# Altium PCB board-rf-4kenh.PcbDoc
Units mm, origin at the board's own origin, x right, y up, seen from the top; angles counter-clockwise.
Board outline 93 x 64 mm, 2 copper layers (Top Layer, Bottom Layer); 76 components, 57 nets, 215 pads, 0 vias.
Unrouted connection lines stored in the file: 1.
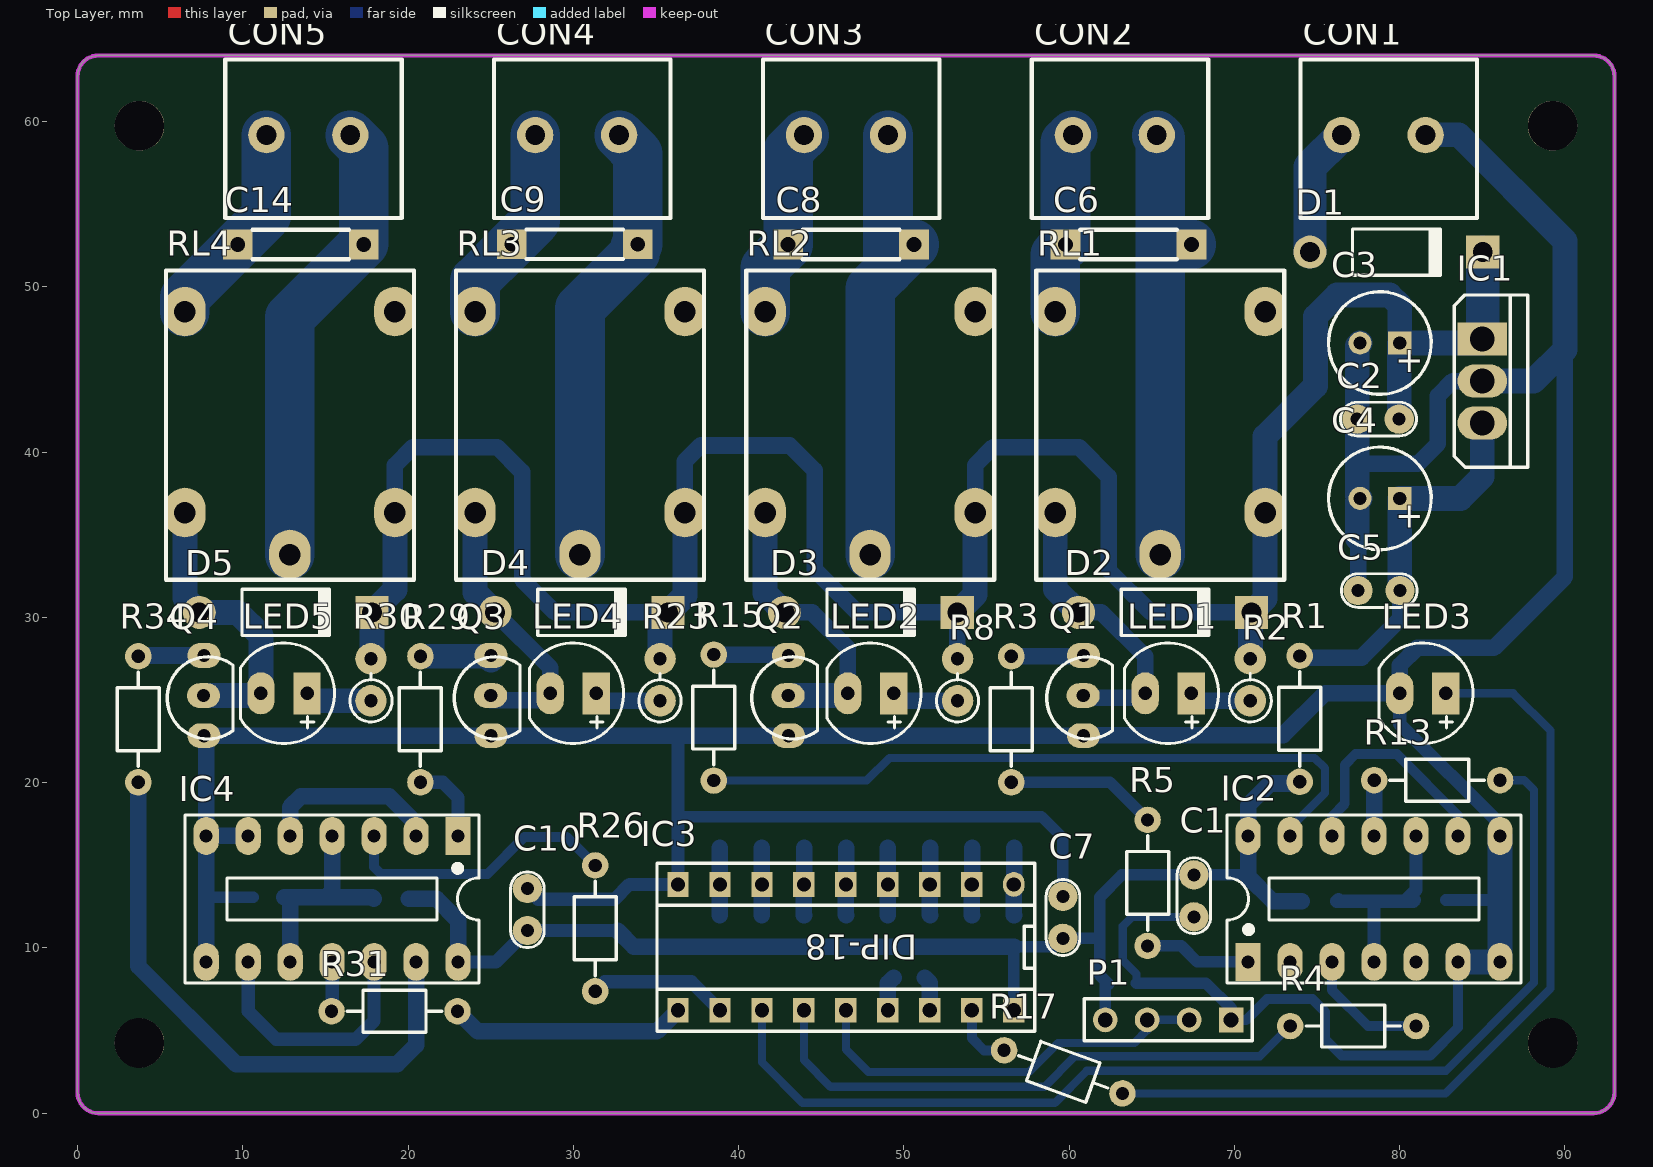
[diagram p0: Top Layer view]
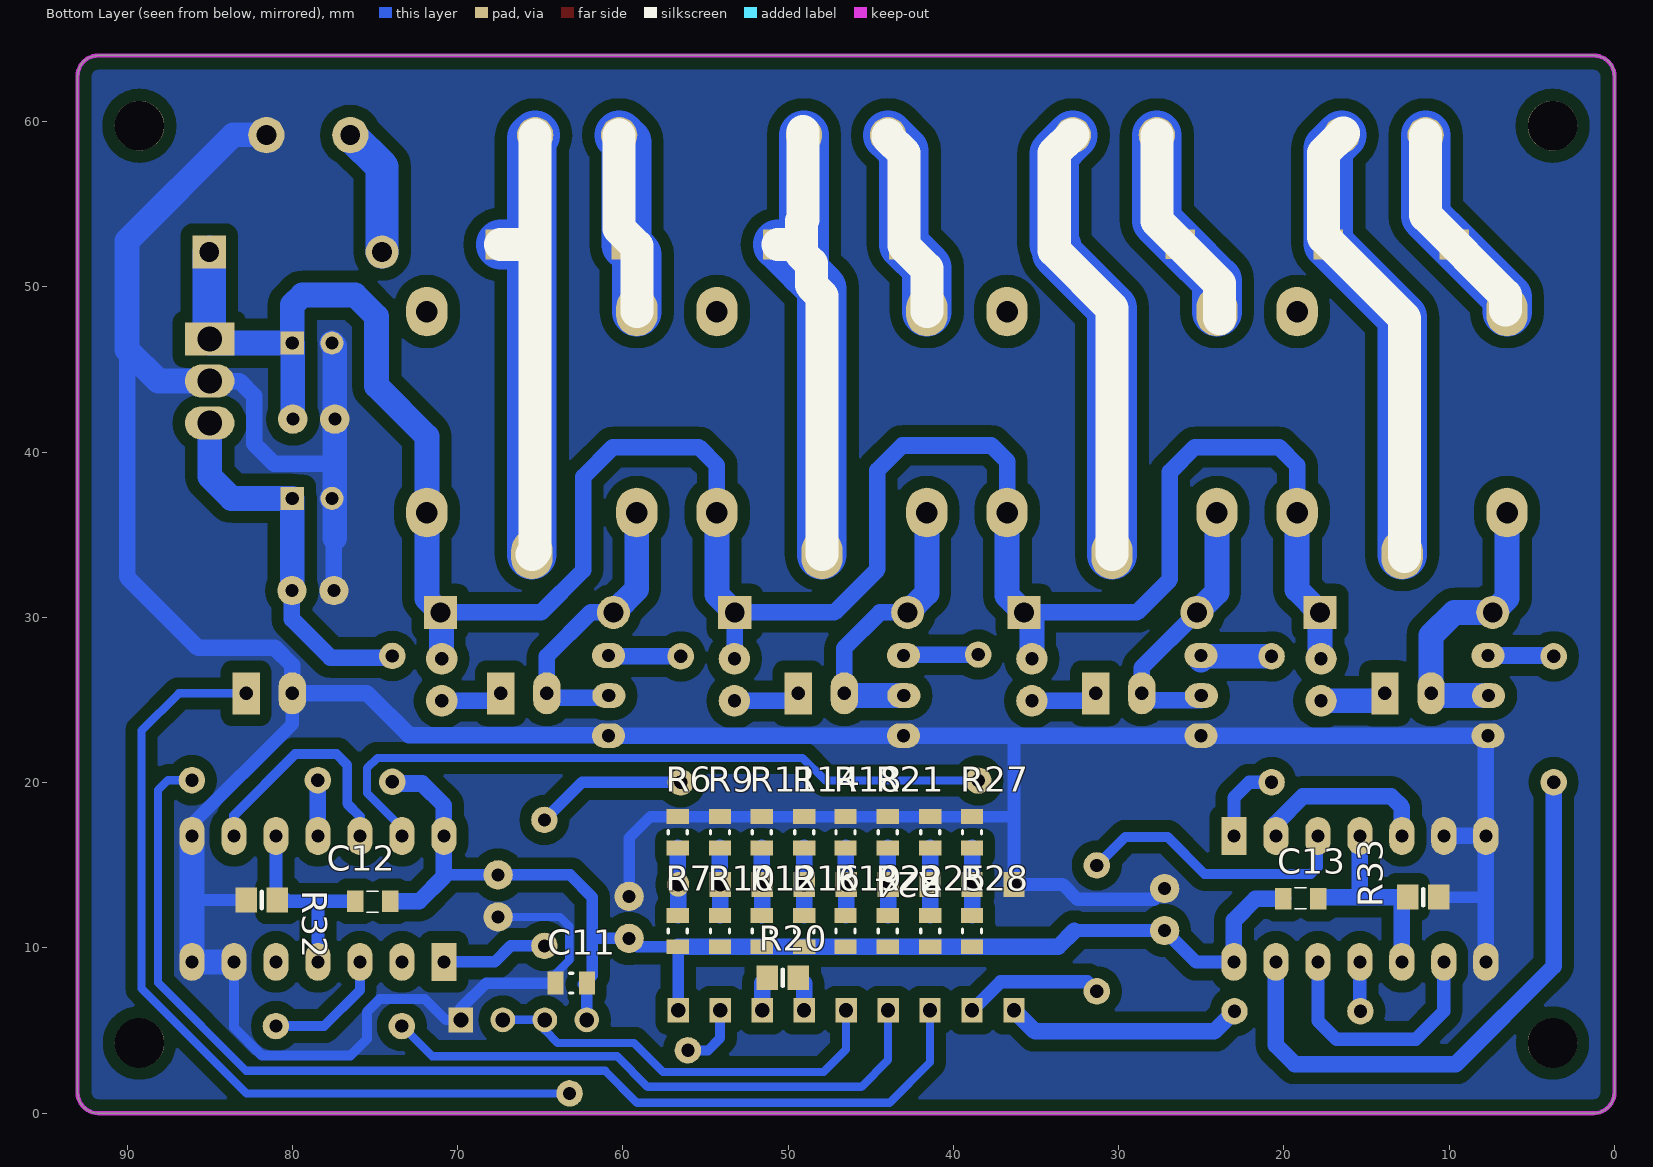
[diagram p1: Bottom Layer view, seen from below]
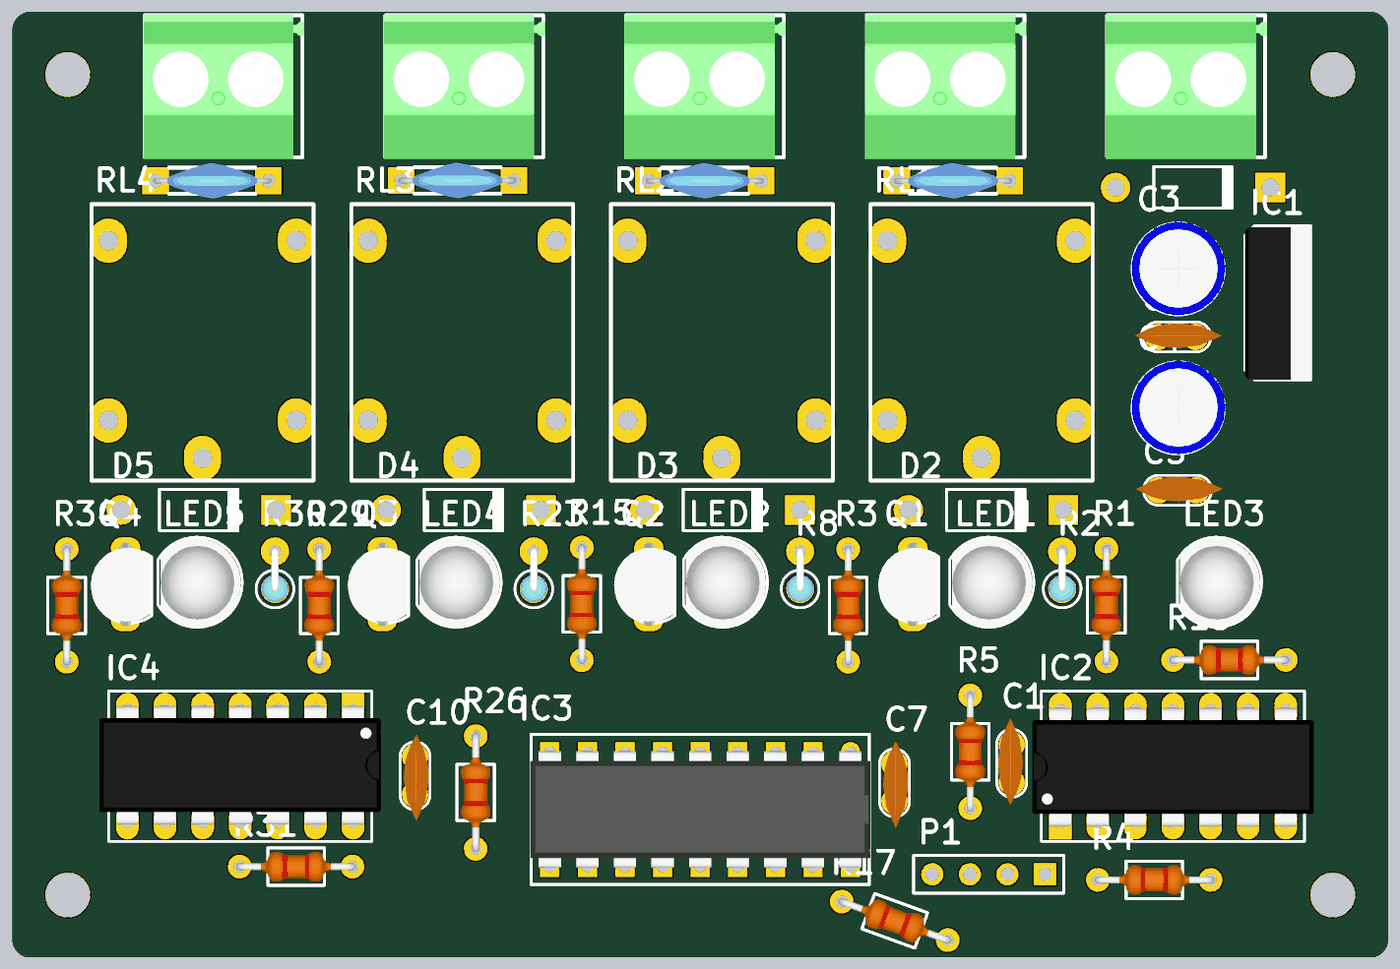
[diagram p2: 3D render of the assembled board from above, using the file's embedded part models]
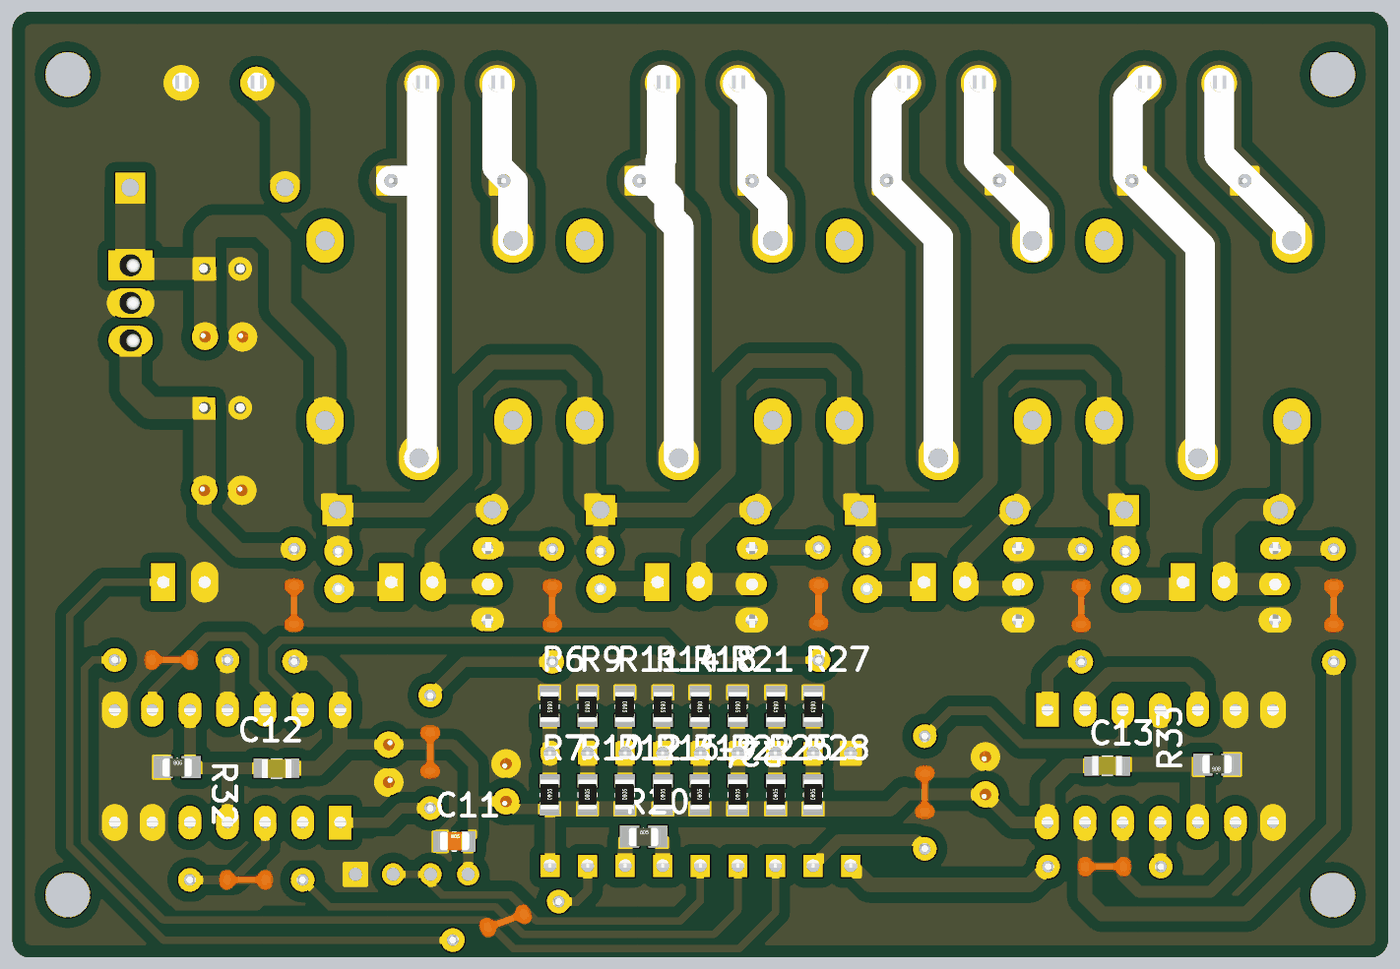
[diagram p3: 3D render of the assembled board from below, using the file's embedded part models]

## Layer stack, top to bottom
Top Solder: solder mask 0.0102, Solder Resist, Dk 3.5
Top Layer: signal copper 0.0356
Dielectric 1: dielectric 0.32, FR-4, Dk 4.8
Bottom Layer: signal copper 0.0356
Bottom Solder: solder mask 0.0102, Solder Resist, Dk 3.5

## Board outline
0,1.27 0,62.73 cw(c1.27,62.73) 1.27,64 91.73,64 cw(c91.73,62.73) 93,62.73 93,1.27 cw(c91.73,1.27) 91.73,0 1.27,0 cw(c1.27,1.27)

## Design rules (kind name [scope] priority, off if disabled: settings)
Clearance Clearance_1 [InPolygon] p1: gap=0.724 ignorepadtopadclearanceinfootprint=FALSE except(0: Text-Hole)
Clearance [All] p2: gap=0.254 ignorepadtopadclearanceinfootprint=FALSE except(0: Arc-Hole Track-Hole SMDPad-Hole THPad-Hole Via-Hole Fill-Hole Poly-Hole Region-Hole Text-Hole)
PlaneConnect [All] p1: planeconnectstyle=Direct reliefexpansion=0.508 reliefentries=4 reliefconductorwidth=0.254 reliefairgap=0.254
PolygonConnect [All] p1: connectstyle=Direct reliefconductorwidth=0.254 reliefentries=4 polygonreliefangle="90 Angle" airgapwidth=0.254
RoomDefinition board-rf-4kenh [InComponentClass('board-rf-4kenh')] p1: confinementstyle=ConfineIn formatcopy=TRUE lockcomponents=FALSE outline -20,87 359,87 359,112 -20,112
RoutingVias [All] p1: holewidth=0.711 width=1.27 viastyle="Through Hole" minholewidth=0.711 minwidth=1.27 maxholewidth=0.711 maxwidth=1.27
SolderMaskExpansion [All] p1: expansion=0.102
Width [All] p1: maxlimit=3 minlimit=0.254 preferedwidth=2
29 further rules are at their usual default settings.

## Components (designator, comment, footprint, x,y, rotation, side; value= is the part's Value field where it differs from the comment)
C1 "Cap1" C_Ceramic 67.55,13.15 r90 top value=104
C2 "Cap1" C_Ceramic 78.7,42 r0 top value=104
C3 "Cap2" "CAPACITOR 6.3x11" 78.8,46.6 r180 top value=10uF
C4 "Cap2" "CAPACITOR 6.3x11" 78.8,37.2 r180 top value=10uF
C5 "Cap1" C_Ceramic 78.75,31.625 r0 top value=104
C6 "103/2KV" 103/2KV 59.78,52.56 r0 top
C7 "Cap1" C_Ceramic 59.625,11.85 r270 top value=104
C8 "103/2KV" 103/2KV 43,52.56 r0 top
C9 "103/2KV" 103/2KV 26.28,52.581 r0 top
C10 "Cap1" C_Ceramic 27.225,12.325 r270 top value=104
C11 "Cap1" "CM 0805" 63.125,7.875 r180 bottom value=104
C12 "Cap2" CM-0805 75.125,12.825 r0 bottom value=100nF
C13 "Cap2" CM-0805 19,12.975 r180 bottom value=100nF
C14 "103/2KV" 103/2KV 9.7,52.56 r0 top
CON1 "Terminal 2" "Terminal 2 5.08" 79.03,59.182 r0 top value="Connector 2"
CON2 "Terminal 2" "Terminal 2 5.08" 62.765,59.182 r0 top value="Connector 2"
CON3 "Terminal 2" "Terminal 2 5.08" 46.5,59.182 r0 top value="Connector 2"
CON4 "Terminal 2" "Terminal 2 5.08" 30.235,59.182 r0 top value="Connector 2"
CON5 "Terminal 2" "Terminal 2 5.08" 13.97,59.182 r0 top value="Connector 2"
D1 "Diode 1N4007" DO-41 79.796,52.1 r0 top
D2 "Diode 1N4148" DO-41 65.8,30.3 r0 top
D3 "Diode 1N4148" DO-41 48,30.3 r0 top
D4 "Diode 1N4148" DO-41 30.5,30.3 r0 top
D5 "Diode 1N4148" DO-41 12.6,30.3 r0 top
IC1 "LM7805" TO220 87.4,49.56 r270 top
IC2 "CD4013" DIP14/W0.3 70.83,9.155 r0 top
IC3 "PT2272" DIP.100/18/W.300/L.900 46.495,10.035 r180 top
IC4 "CD4013" DIP14/W0.3 23.03,16.775 r180 top
LED1 "LED" LED-5R 66,25.409 r180 top value="LED 3 ly Single Colour"
LED2 "LED" LED-5R 48,25.409 r180 top value="LED 3 ly Single Colour"
LED3 "LED" LED-5R 81.397,25.409 r180 top value="LED 3 ly Single Colour"
LED4 "LED" LED-5R 30,25.409 r180 top value="LED 3 ly Single Colour"
LED5 "LED" LED-5R 12.497,25.409 r180 top value="LED 3 ly Single Colour"
P1 "Module RF" HDR1X4 69.805,5.65 r180 top
Q1 "NPN" TRAN-LOWPOWER 61,25.13 r0 top
Q2 "NPN" TRAN-LOWPOWER 43.151,25.13 r0 top
Q3 "NPN" TRAN-LOWPOWER 25.151,25.13 r0 top
Q4 "NPN" TRAN-LOWPOWER 7.785,25.13 r0 top
R1 "Res1" R0.25W-D7.6 73.95,20.05 r90 top value=0R
R2 "Res1" "R 1/4W1" 70.959,26.222 r90 top value=1K
R3 "Res1" R0.25W-D7.6 56.5,20.024 r90 top value=2.2k
R4 "Res1" R0.25W-D7.6 80.995,5.275 r180 top value=100R
R5 "Res1" R0.25W-D7.6 64.75,10.125 r90 top value=2.2k
R6 "0" "R 0805" 56.675,17 r270 bottom value=1k
R7 "0" "R 0805" 56.675,11.025 r90 bottom value=1k
R8 "Res1" "R 1/4W1" 53.25,26.222 r90 top value=1K
R9 "0" "R 0805" 54.125,17 r270 bottom value=1k
R10 "0" "R 0805" 54.125,11.025 r90 bottom value=1k
R11 "0" "R 0805" 51.6,17 r270 bottom value=1k
R12 "0" "R 0805" 51.6,11.025 r90 bottom value=1k
R13 "Res1" R0.25W-D7.6 78.455,20.15 r0 top value=100R
R14 "0" "R 0805" 49.025,17 r270 bottom value=1k
R15 "Res1" R0.25W-D7.6 38.5,20.13 r90 top value=2.2k
R16 "0" "R 0805" 49.025,11.025 r90 bottom value=1k
R17 "Res1" R0.25W-D7.6 63.225,1.2 r160 top value=1K
R18 "0" "R 0805" 46.525,17 r270 bottom value=1k
R19 "0" "R 0805" 46.525,11.025 r90 bottom value=1k
R20 "Res1" R0805 50.325,8.2 r180 bottom value=820k
R21 "0" "R 0805" 43.975,17 r270 bottom value=1k
R22 "0" "R 0805" 43.975,11.025 r90 bottom value=1k
R23 "Res1" "R 1/4W1" 35.25,26.222 r90 top value=1K
R24 "0" "R 0805" 41.4,17 r270 bottom value=1k
R25 "0" "R 0805" 41.4,11.025 r90 bottom value=1k
R26 "Res1" R0.25W-D7.6 31.325,14.995 r270 top value=100R
R27 "0" "R 0805" 38.875,17 r270 bottom value=1k
R28 "0" "R 0805" 38.875,11.025 r90 bottom value=1k
R29 "Res1" R0.25W-D7.6 20.75,20.024 r90 top value=2.2k
R30 "Res1" "R 1/4W1" 17.759,26.222 r90 top value=1K
R31 "Res1" R0.25W-D7.6 15.375,6.17 r0 top value=100R
R32 "Res1" R0805 81.85,12.9 r180 bottom value=1K
R33 "Res1" R0805 11.575,13.075 r0 bottom value=1K
R34 "Res1" R0.25W-D7.6 3.683,20.024 r90 top value=2.2k
RL1 "Relay" RELAY5PIN-10A 65.508,33.805 r0 top value="Relay SPDT, 10A, 12V"
RL2 "Relay" RELAY5PIN-10A 47.957,33.805 r0 top value="Relay SPDT, 10A, 12V"
RL3 "Relay" RELAY5PIN-10A 30.405,33.805 r0 top value="Relay SPDT, 10A, 12V"
RL4 "Relay" RELAY5PIN-10A 12.854,33.805 r0 top value="Relay SPDT, 10A, 12V"

## Footprints (in the part's own frame and the unit in brackets; to place one, negate y for a bottom-side part, rotate by r counter-clockwise, add the part's x,y. Pads: shape width x height; smd on the part's side, far side on the other; paste and mask are expansions set on the pad)
103/2KV [mm]
  rect 1.8x1.8 hole 0.9: 1(0,0) 2(7.62,0)
  silkscreen extent 0.89,-0.89 6.73,0.89, body extent -0.19,-1.2 7.81,1.19, height 9.03
C_Ceramic [mil] "Ceramic Capacitor"
  round 70 hole 31: 1(-50,0) 2(50,0)
  silkscreen extent -90,-40 91,40, body extent -110,-30 120,37, height 265
"CAPACITOR 6.3x11" [mm] "Capacitor, Electrolytic, Radial; Body 10 x 11 mm (Dia.xH typ); Pin Spacing 5 mm (typ)"
  rect 1.4x1.4 hole 0.8: 1(-1.2,0)
  round 1.4 hole 0.8: 2(1.2,0)
  silkscreen extent -3.1,-3.1 3.11,3.1, body extent -3.2,-3.2 3.15,3.15, height 7.33
"CM 0805" [mm]
  rect 0.95x1.4 smd: 1(-0.95,0) 2(0.95,0)
  silkscreen extent -0.1,-0.6 0.1,0.6, body extent -0.97,-0.6 1.03,0.65, height 0.78
CM-0805 [mm] "Capacitor SMD 80x50mil"
  rect 1x1.3 smd: 1(-1.041,0) 2(1.067,0)
  silkscreen extent -0.33,-0.61 0.36,0.66, body extent -1.01,-0.61 1.01,0.66, height 0.61
DIP14/W0.3 [mil] "14PIN, W 300mil, Pin to pin 100mil"
  rect 60x90 hole 31: 1(0,0)
  oval 60x90 hole 31: 2(100,0) 3(200,0) 4(300,0) 5(400,0) 6(500,0) 7(600,0) 8(600,300) 9(500,300) 10(400,300) 11(300,300) 12(200,300) 13(100,300) 14(0,300)
  silkscreen extent -50,-50 650,350, body extent -75,-10 675,305, height 159
DIP.100/18/W.300/L.900 [mil]
  oval 51x59 hole 34: 1(-400,-150)
  rect 51x59 / inner round 58 / far side rect 51x59 hole 34: 2(-300,-150) 3(-200,-150) 4(-100,-150) 5(0,-150) 6(100,-150) 7(200,-150) 8(300,-150) 9(400,-150) 10(400,150) 11(300,150) 12(200,150) 13(100,150) 14(0,150) 15(-100,150) 16(-200,150) 17(-300,150) 18(-400,150)
  silkscreen extent -450,-200 450,200, body extent -453,-155 453,155, height 200
DO-41 [mm] "Diode, Axial; Body 5.2 x 2.7 mm (LxDia. max), Lead Dia. 0.86 mm (max)"
  round 2 hole 1.2: 1(-5.23,0)
  rect 2x2 hole 1.2: 2(5.23,0)
  silkscreen extent -2.65,-1.4 2.75,1.4
HDR1X4 [mm] "Connector; Header; 4 Position"
  rect 1.5x1.5 hole 0.9: 1(0,0)
  round 1.5 hole 0.9: 2(2.54,0) 3(5.08,0) 4(7.62,0)
  silkscreen extent -1.27,-1.27 8.89,1.27
LED-5R [mil] "LED 2 PIN, 5 ly , Only Red colour, pin to pin 110mil"
  rect 65x100 hole 32: 1(-55,0)
  oval 65x100 hole 32: 2(55,0)
  silkscreen extent -120,-120 104,120, body extent -116,-117 98,120, height 485
R0.25W-D7.6 [mm]
  round 1.6 hole 0.8: 1(0,0) 2(7.62,0)
  silkscreen extent 0.95,-1.27 6.67,1.27, body extent -0.25,-1 7.85,1, height 1.3
R0805 [mm] "Chip Resistor; Body 2.0 x 1.2 mm (LxW typ)"
  rect 1.3x1.5 smd: 1(0.95,0) 2(-0.95,0)
  silkscreen extent 0,-0.5 0,0.5, body extent -1,-0.65 1,0.6, height 0.78
"R 1/4W1" [mm] "R 1/4W, 2 Pin, 150mil"
  round 1.905 hole 0.8: 1(-1.27,0) 2(1.27,0)
  silkscreen extent -2.55,-1.28 0.38,1.27, body extent -2.16,-0.92 1.55,0.92, height 6.75
"R 0805" [mm]
  rect 0.9x1.35 smd: 1(-0.95,0) 2(0.95,0)
  silkscreen extent -0.1,-0.58 0.1,0.58, body extent -0.97,-0.62 1.03,0.63, height 0.5
RELAY5PIN-10A [mm]
  oval 2.5x3 hole 1.3: 1(0,0) 2(-6.35,14.7) 3(6.35,14.7) 4(-6.35,2.54) 5(6.35,2.54)
  silkscreen extent -7.49,-1.52 7.51,17.18, body extent -7.49,-1.52 7.49,17.14, height 16
"Terminal 2 5.08" [mm] "Terminal block 5.08mm 2 ways"
  round 2.2 hole 1.2: 1(-2.54,0) 2(2.54,0)
  silkscreen extent -5.02,-5.02 5.65,4.57, body extent -5.13,-5.15 5.78,4.65, height 14.2
TO220 [mm]
  rect 2x3 hole 1.5: 1(2.72,-2.4)
  oval 2x3 hole 1.5: 2(5.26,-2.4) 3(7.8,-2.4)
  silkscreen extent 0.05,-4.1 10.47,0.35, body extent 0.15,-4.1 10.45,0.4, height 18.8
TRAN-LOWPOWER [mm] "TO, Flat Index; 3 In-Line, Axial Leads; Body Dia. 4.5mm; Leads 0.51 x 0.48 mm (max)"
  oval 2x1.5 hole 0.8: 1(-0.127,-2.286) 2(-0.151,0.139) 3(-0.127,2.564)
  silkscreen extent -2.35,-2.48 1.63,2.48, body extent -2.48,-2.79 1.52,3.01, height 11

## Part data
C1 C2 C5 C7 C10 C11: "Polar Capacitor", LatestRevisionDate=17-Jul-2002, LatestRevisionNote="Re-released for DXP Platform.", PackageDescription="Radial Cap, Thru-Hole; 2 Leads; 0.3 in Pin Spacing", PackageReference=RAD-0.3, Published=8-Jun-2000, Publisher="Altium Limited"
C3 C4 C12 C13: "Capacitor", PackageDescription="Capacitor; 2 Leads", PackageReference=CAPR5-4X5, Published=23-Sep-2002, Publisher="Altium Limited"
D1: "1 Amp General Purpose Rectifier", Code_JEDEC=DO-204-AL, ComponentLink1Description="Manufacturer Link", ComponentLink1URL=http://www.fairchildsemi.com/, ComponentLink2Description=Datasheet, ComponentLink2URL=http://www.fairchildsemi.com/ds/1N%2F1N4001.pdf, DatasheetVersion=1998, LatestRevisionDate=17-Jul-2002, LatestRevisionNote="Re-released for DXP Platform.", PackageDescription="Diode, Axial; Body 5.2 x 2.7 mm (LxDia. max), Lead Dia. 0.86 mm (max)", PackageReference=DO-41, PackageVersion=Aug-1999, Published=8-Jun-2000, Publisher="Altium Limited"
D2 D3 D4 D5: "High Conductance Fast Diode", Code_JEDEC=DO-204-AH, ComponentLink1Description="Manufacturer Link", ComponentLink1URL=http://www.fairchildsemi.com/, ComponentLink2Description=Datasheet, ComponentLink2URL=http://www.fairchildsemi.com/ds/1N%2F1N4148.pdf, DatasheetVersion=1997, LatestRevisionDate=17-Jul-2002, LatestRevisionNote="Re-released for DXP Platform.", PackageDescription="Diode, Axial; Body 3.8 x 1.9 mm (LxDia. max), Lead Dia. 0.53 mm (max)", PackageReference=DO-35, Published=8-Jun-2000, Publisher="Altium Limited"
IC1: library part LM78xx, "On ap +, from + 5 to + 24VDC", =LM7808
IC2 IC4: library part CD4013B, "Dual D-Type Flip-Flop", Creat by=VanDungEvn@Gmail.com
IC3: "Remote Control Decoder"
LED1 LED2 LED3 LED4 LED5: "LED Single colour Green and Red"
P1: library part "Header 4", "Header, 4-Pin", LatestRevisionDate=17-Jul-2002, LatestRevisionNote="Re-released for DXP Platform.", Publisher="Altium Limited"
Q1 Q2 Q3 Q4: "NPN General", PackageDocument=Sep-1998, Code_JEDEC=TO-92A, ComponentLink1Description="Manufacturer Link", ComponentLink1URL=http://www.fairchildsemi.com/, ComponentLink2Description=Datasheet, ComponentLink2URL=http://www.fairchildsemi.com/ds/2N%2F2N3904.pdf, DatasheetDocument=1997, LatestRevisionDate=15-Jan-2003, LatestRevisionNote="PCB Footprint 'BCY-W3/D4.7' replaced", PackageReference=TO-92A, Published=8-Jun-2000, Publisher="Altium Limited"
R1 R2 R3 R4 R5 R8 R13 R15 R17 R20 R23 R26 R29 R30 R31 R32 R33 R34: "Resistor", LatestRevisionDate=17-Jul-2002, LatestRevisionNote="Re-released for DXP Platform.", PackageDescription="Axial Device, Thru-Hole; 2 Leads; 0.3 in Pin Spacing", PackageReference=AXIAL-0.3, Published=8-Jun-2000, Publisher="Altium Limited"
R6 R7 R9 R10 R11 R12 R14 R16 R18 R19 R21 R22 R24 R25 R27 R28: library part RM, "Resistor SMD", Manufacturer=UniOhm, Manufacturer No=RM10JTN102, Power Rating=1/10W, Specification="1k  1/10W"
RL1 RL2 RL3 RL4: library part "Relay 1", "Relay SPDT 5 Pin", ="Relay SPDT, 10A, 24V"

## Free pads (board coordinates)
  round 3 hole 3: 0(3.75,4.25) 0(3.75,59.75) 0(89.25,4.25) 0(89.25,59.75)

## Nets (pads, with @x,y where several pads share a name; then routed paths per layer and width w, separated by ;. In a path a pad name is that pad's centre, name@x,y a point inside that pad or via, vN(x,y) a via of type N, cw(c..) or ccw(c..) an arc to the next point about the centre after c; other vN are vias at no path point)
+12V: C2.2 C3.1 D1.2 D2.2 D3.2 D4.2 D5.2 IC1.1 R2.2 R8.2 R23.2 R30.2 RL1.5 RL2.5 RL3.5 RL4.5 | length 156.3
  Bottom Layer w1: RL4.5 19.204,39.204 20.3,40.3 25.4,40.3 26.9,38.8 26.9,32.3 28.9,30.3 D4.2 ; RL3.5 36.755,39.455 37.7,40.4 43.1,40.4 44.6,38.9 44.6,32.9 47.2,30.3 D3.2 53.23,27.664 R8.2@53.25,27.644 ; RL2.5 54.307,39.207 55.4,40.3 60.6,40.3 62.4,38.5 62.4,32.85 64.95,30.3 D2.2
  Bottom Layer w1.5: R30.2 17.83,27.563 D5.2 19.204,31.674 RL4.5 ; R23.2@35.25,27.75 35.25,29.82 D4.2 36.755,31.325 RL3.5 ; D3.2 54.307,31.377 RL2.5 ; R2.2@70.975,27.492 70.975,30.245 D2.2 71.858,31.128 RL1.5 71.858,40.958 74.9,44 74.9,48.2 76.2,49.5 79.4,49.5 80,48.9 C3.1 ; C2.2 79.97,46.57 C3.1 ; IC1.1 84.76,46.6 C3.1
  Bottom Layer w2: IC1.1 85.026,46.866 D1.2
A1: IC3.1 R6.2 R7.2 | length 4.1
  Bottom Layer w1: R7.2 56.655,11.995 IC3.1 56.675,13.865 R6.2
A2: IC3.2 R9.2 R10.2 | length 4.1
  Bottom Layer w1: R10.2 54.115,11.985 IC3.2 54.125,13.855 R9.2
A3: IC3.3 R11.2 R12.2 | length 4.1
  Bottom Layer w1: R12.2 51.575,12 IC3.3 51.6,13.87 R11.2
A4: IC3.4 R14.2 R16.2 | length 4.1
  Bottom Layer w1: R16.2 49.035,11.985 IC3.4 49.025,13.855 R14.2
A5: IC3.5 R18.2 R19.2 | length 4.1
  Bottom Layer w1: R19.2 46.495,12.005 IC3.5 46.525,13.875 R18.2
A6: IC3.6 R21.2 R22.2 | length 4.1
  Bottom Layer w1: R22.2 43.955,11.995 IC3.6 43.975,13.865 R21.2
A7: IC3.7 R24.2 R25.2 | length 4.1
  Bottom Layer w1: R25.2 41.415,11.99 IC3.7 41.4,13.86 R24.2
A8: IC3.8 R27.2 R28.2 | length 4.1
  Bottom Layer w1: R28.2 IC3.8 R27.2
DATAIN: IC3.14 P1.2 P1.3 | length 25.4
  Bottom Layer w0.5: IC3.14 46.495,3.855 47.848,2.502 57.577,2.502 59.325,4.25 63.95,4.25 64.725,5.025 P1.3 P1.2
GND: C1.1 C2.1 C3.2 C4.2 C5.1 C7.1 C10.1 C11.1 CON1.2 IC1.2 IC2.6 IC2.7 IC2.8 IC3.9 IC4.6 IC4.7 IC4.8 LED3.2 P1.1 Q1.1 Q2.1 Q3.1 Q4.1 R6.1 R9.1 R11.1 R14.1 R18.1 R21.1 R24.1 R27.1 R32.2 R33.2 | length 277.3
  Bottom Layer w0.5: C11.1 64.075,8.425 63.25,9.25 63.25,11.325 63.805,11.88 C1.1
  Bottom Layer w0.6: P1.1 70.715,5.65 71.965,6.9 74.725,6.9 75.487,6.138 75.487,4.488 76.475,3.5 81.85,3.5 83.53,5.18 IC2.6
  Bottom Layer w0.7: 7.79,13 7.865,13.075 R33.2 ; 36.335,17.925 36.36,17.95 R27.1 R24.1 R21.1 R18.1 R14.1 R11.1 R9.1 R6.1 58.325,17.95 59.625,16.65 C7.1 ; C11.1 68.275,7.875 69.805,6.345 P1.1 ; R32.2 86.07,12.9
  Bottom Layer w0.8: C10.1 27.87,12.95 32.5,12.95 33.395,13.845 IC3.9 36.335,17.925 36.335,22.804 36.375,22.844 ; LED3.2 80,23.55 86.07,17.48 IC2.8
  Bottom Layer w1: IC4.8 7.79,13 IC4.7 ; IC4.6 IC4.7 ; Q3.1@24.755,22.844 Q4.1 7.79,22.712 IC4.7 ; Q3.1 36.375,22.844 Q2.1 Q1.1 60.904,22.875 72.95,22.875 75.484,25.409 LED3.2 80,27.1 81.05,28.15 85.7,28.15 90,32.45 90,46.2 ; 77.43,34.8 77.48,34.75 C5.1 ; 77.43,39.3 81.1,39.3 82.3,40.5 82.3,43.4 83.2,44.3 IC1.2
  Bottom Layer w1.5: 77.43,34.8 77.43,37.03 C4.2 77.43,37.37 77.43,39.3 C2.1 77.43,46.43 C3.2 ; CON1.2 81.588,59.2 83.575,59.2 90,52.775 90,46.2 88.1,44.3 IC1.2 ; IC2.6 IC2.7 86.07,12.9 IC2.8
NetC4_1: C4.1 C5.2 IC1.3 R1.2 | length 22.9
  Bottom Layer w1: R1.2@74.225,27.57 77.695,27.57 80.02,29.895 C5.2
  Bottom Layer w1.5: C5.2 80,31.645 C4.1 83.675,37.2 85,38.525 IC1.3
NetC6_1: C6.1 CON2.1 RL1.2 | length 11.1
  Bottom Layer w3: RL1.2 59.158,51.938 C6.1 59.78,58.737 CON2.1
NetC6_2: C6.2 CON2.2 RL1.1 | length 27.5
  Bottom Layer w3: CON2.2 65.508,58.979 65.508,52.892 ; RL1.1 65.508,52.892 ; C6.2 65.84,52.56 65.508,52.892
NetC8_1: C8.1 CON3.1 RL2.2 | length 11.7
  Bottom Layer w3: RL2.2 41.607,51.167 C8.1 43,58.222 CON3.1
NetC8_2: C8.2 CON3.2 RL2.1 | length 28.1
  Bottom Layer w3: RL2.1 47.957,49.897 49.04,50.98 ; CON3.2 49.04,50.98 ; C8.2 49.04,50.98
NetC9_1: C9.1 CON4.1 RL3.2 | length 12.2
  Bottom Layer w3: RL3.2 24.055,50.356 C9.1 27.695,53.996 CON4.1
NetC9_2: C9.2 CON4.2 RL3.1 | length 27.3
  Bottom Layer w3: RL3.1 30.405,48.705 33.751,52.051 33.751,52.432 C9.2 33.9,58.057 CON4.2
NetC14_1: C14.1 CON5.1 RL4.2 | length 12.7
  Bottom Layer w3: RL4.2 6.504,49.364 C14.1 11.43,54.29 CON5.1
NetC14_2: C14.2 CON5.2 RL4.1 | length 27.6
  Bottom Layer w3: RL4.1 12.854,48.154 17.32,52.62 17.32,58.372 CON5.2
NetCON1_1: CON1.1 D1.1 | length 7.9
  Bottom Layer w2: D1.1 74.566,57.258 CON1.1
NetD2_1: D2.1 LED1.2 Q1.2 RL1.4 | length 17.9
  Bottom Layer w1: D2.1 61.95,30.3 64.603,27.647 LED1.2 64.333,25.139 Q1.2@60.849,25.139
  Bottom Layer w1.5: RL1.4 59.158,31.712 D2.1
NetD3_1: D3.1 LED2.2 Q2.2 RL2.4 | length 17.7
  Bottom Layer w1: D3.1 44.45,30.3 46.603,28.147 LED2.2
  Bottom Layer w1.5: RL2.4 41.607,31.463 D3.1 ; Q2.2 46.463,25.269 LED2.2
NetD4_1: D4.1 LED4.2 Q3.2 RL3.4 | length 16.6
  Bottom Layer w1: Q3.2@25,25 28.194,25 LED4.2 28.603,26.967 D4.1
  Bottom Layer w1.5: RL3.4 24.055,31.515 D4.1
NetD5_1: D5.1 LED5.2 Q4.2 RL4.4 | length 17.7
  Bottom Layer w1.5: RL4.4 6.504,31.166 D5.1 9.7,30.3 11.1,28.9 LED5.2 10.96,25.269 Q4.2
NetIC2_1: IC2.1 R5.1 | length 6.5
  Bottom Layer w0.7: R5.1 66.775,10.125 67.745,9.155 IC2.1
NetIC2_2: IC2.2 IC2.5
NetIC2_3: IC2.3 R4.1 | length 7.8
  Bottom Layer w0.6: IC2.3 75.91,7.44 78.075,5.275 R4.1
  Bottom Layer w0.7: R4.1@80.995,4.975 R4.1@81.095,4.975
NetIC2_9: IC2.9 IC2.12 | length 14.5
  Bottom Layer w0.6: IC2.12 75.91,17.96 76.675,18.725 76.675,21.075 77.325,21.725 79.825,21.725 83.53,18.02 IC2.9
NetIC2_11: IC2.11 R13.1 | length 3.4
  Bottom Layer w1: IC2.11 78.455,16.78 R13.1
NetIC2_13: IC2.13 R15.1 | length 42.8
  Bottom Layer w0.5: R15.1 47.755,20.13 49.125,21.5 74.85,21.5 75.475,20.875 75.475,19.375 IC2.13@73.37,17.27
  Bottom Layer w0.6: IC2.13 IC2.13@73.37,17.27
NetIC3_10: IC3.10 R31.2 | length 14.4
  Bottom Layer w1: R31.2 24.215,4.95 35.06,4.95 IC3.10
NetIC3_11: IC3.11 R26.2 | length 8.5
  Bottom Layer w0.8: R26.2 31.9,7.95 37.15,7.95 IC3.11
NetIC3_12: IC3.12 R13.2 | length 67.8
  Bottom Layer w0.5: IC3.12 41.415,3.085 43.869,0.631 59.131,0.631 61.071,2.571 82.796,2.571 88.125,7.9 88.125,19.55 87.525,20.15 R13.2
NetIC3_13: IC3.13 R4.2 | length 34.6
  Bottom Layer w0.5: IC3.13 43.955,3.22 45.575,1.6 58.5,1.6 60.35,3.45 71.55,3.45 R4.2
NetIC3_15: IC3.15 R20.1 | length 2.1
  Bottom Layer w1: IC3.15 49.035,7.86 R20.1
NetIC3_16: IC3.16 R20.2 | length 2.1
  Bottom Layer w1: R20.2 51.575,7.9 IC3.16
NetIC3_17: IC3.17 R17.2 | length 3.9
  Bottom Layer w0.6: IC3.17 54.115,4.535 54.844,3.806 R17.2
NetIC4_1: IC4.1 R29.1 | length 5
  Bottom Layer w0.8: R29.1 22.101,20.024 23.03,19.095 IC4.1
NetIC4_2: IC4.2 IC4.5 | length 11.1
  Bottom Layer w1: IC4.5 12.87,18.52 13.525,19.175 18.85,19.175 20.49,17.535 IC4.2
NetIC4_3: IC4.3 R26.1 | length 17.1
  Bottom Layer w0.6: IC4.3 17.95,14.9 18.375,14.475 24.8,14.475 27.05,16.725 29.595,16.725 R26.1
NetIC4_9: IC4.9 IC4.12 | length 15.3
  Bottom Layer w0.8: IC4.9 10.33,6.17 12.025,4.475 16.825,4.475 17.95,5.6 IC4.12
NetIC4_11: IC4.11 R31.1 | length 3
  Bottom Layer w0.8: R31.1 15.41,6.205 IC4.11
NetIC4_13: IC4.13 R34.1 | length 35.9
  Bottom Layer w1: R34.1 3.683,8.892 9.6,2.975 19.35,2.975 20.49,4.115 IC4.13
NetLED1_1: LED1.1 R2.1 | length 3.8
  Bottom Layer w1: LED1.1 67.854,24.952 R2.1 R2.1@70.975,24.952
NetLED2_1: LED2.1 R8.1 | length 4
  Bottom Layer w1: LED2.1 49.854,24.952 R8.1
NetLED3_1: LED3.1 R17.1 | length 51.4
  Bottom Layer w0.5: R17.1 82.775,1.2 89.125,7.55 89.125,23.15 86.866,25.409 LED3.1
NetLED4_1: LED4.1 R23.1 | length 4
  Bottom Layer w1: LED4.1 31.854,24.952 R23.1
NetLED5_1: LED5.1 R30.1 | length 4.1
  Bottom Layer w1.5: LED5.1 14.351,24.952 R30.1
NetQ1_3: Q1.3 R3.2 | length 4.4
  Bottom Layer w1: R3.2 60.793,27.644 Q1.3@60.873,27.564
NetQ2_3: Q2.3 R15.2 | length 4.5
  Bottom Layer w1: R15.2 42.968,27.75 Q2.3
NetQ3_3: Q3.3 R29.2 | length 4.4
  Bottom Layer w1.5: R29.2 24.805,27.644 Q3.3@25.024,27.425
NetQ4_3: Q4.3 R34.2 | length 4
  Bottom Layer w1: R34.2 3.733,27.694 Q4.3
NetR3_1: R3.1 R5.2 | length 9.2
  Bottom Layer w0.7: R3.1 62.471,20.024 R5.2
reset1: C12.2 IC2.4 IC2.10 R32.1 | length 13.3
  Bottom Layer w0.8: C12.2@76.304,12.938 C12.2 78.35,12.825 ; IC2.4 78.45,12.725 78.35,12.825 ; IC2.10 80.99,13.515 80.375,12.9 R32.1 80.825,12.825 78.35,12.825
reset2: C13.2 IC4.4 IC4.10 R33.1 | length 13.2
  Bottom Layer w1: R33.1 R33.1@12.87,13.075 ; IC4.10 R33.1@12.87,13.075 ; IC4.4 15.41,13.435 15.05,13.075 ; C13.2 17.833,13.075 15.05,13.075 ; R33.1@12.87,13.075 15.05,13.075
VCC: C1.2 C7.2 C10.2 C11.2 C12.1 C13.1 IC2.14 IC3.18 IC4.14 P1.4 R1.1 R7.1 R10.1 R12.1 R16.1 R19.1 R22.1 R25.1 R28.1 | length 79.6
  Bottom Layer w0.7: IC3.18 56.655,10.055 R7.1 59.12,10.075 C7.2 61.82,10.58 61.85,10.55 ; C11.2 62.185,7.865 P1.4 ; C11.2@62.4,7.8 61.85,8.35 61.85,10.55 ; 70.83,14.32 70.73,14.42 C1.2 63.195,14.42 61.85,13.075 61.85,10.55
  Bottom Layer w0.8: IC4.14 25.325,9.155 C10.2 32.68,11.055
  Bottom Layer w1: C13.1 21.725,12.975 23.03,11.67 IC4.14 ; 32.68,11.055 33.66,10.075 R28.1 R25.1 R22.1 R19.1 R16.1 R12.1 R10.1 R7.1 ; C12.1 72.325,12.825 70.83,14.32 IC2.14 70.83,18.63 72.15,19.95 R1.1@74.225,19.95
pads on no net: RL1.3 RL2.3 RL3.3 RL4.3

## Polygon pours and split planes (outlines as drawn)
GND on Bottom Layer "Top Layer-No Net" (solid, pour order 0): 1,64 92,64 93,63 93,0.9 92.2,0.1 91.83,0.1 91.73,0 1.1,0 0,1.1 0,63

## Keep-outs
Keep-Out Layer:
  the board outline again, w0.254

## Silkscreen, mask and mechanical layers (free items; w line width, h text height)
Bottom Overlay:
  lines w2: 6.6,48.6 6.6,49.5 11.4,54.3 ; 11.43,54.33 11.43,59.182 ; 12.7,33.7 12.7,48.1 17.6,53 17.6,58.1 16.4,59.3 ; 23.9,48.1 23.9,50.201 ; 24.055,50.356 27.695,53.996 27.695,59.182 ; 30.405,33.805 30.405,48.705 33.9,52.2 33.9,58.1 32.818,59.182 32.775,59.182 ; 41.607,48.505 41.607,51.107 43,52.5 43,58.1 43.96,59.06 43.96,59.182 ; 47.957,33.805 47.957,49.457 48.6,50.1 48.6,51.4 49.2,52 49.2,53.98 49.1,54.08 49.1,59.4 ; 49.5,52.4 49.66,52.56 50.62,52.56 ; 59.158,48.505 59.158,52.458 60.225,53.525 60.225,59.182 ; 65.305,59.182 65.305,34.008 65.508,33.805 ; 65.4,52.4 65.56,52.56 67.4,52.56
Mechanical 1:
  lines w0.254: 0,1.27 ccw(c1.27,1.27) 1.27,0 2,0 91,0 91.73,0 ccw(c91.73,1.27) 93,1.27 93,62 93,62.73 ccw(c91.73,62.73) 91.73,64 2,64 1.27,64 ccw(c1.27,62.73) 0,62.73 0,62 0,2 0,1.27

## Text inside footprints (layer, text, board x,y; h text height)
C3: Top Overlay "+" at 81.45,46.15 h1.5 r180
C4: Top Overlay "+" at 81.45,36.75 h1.5 r180
IC3: Top Overlay "DIP-18" at 50.813,10.797 h1.5 r180